# Altium PCB CurrentTrans-board-multi.PcbDoc
Units mm, origin at the board's own origin, x right, y up, seen from the top; angles counter-clockwise.
Board outline 89.79 x 173.35 mm, 2 copper layers (Top Layer, Bottom Layer); 11 components, 11 nets, 57 pads, 0 vias.
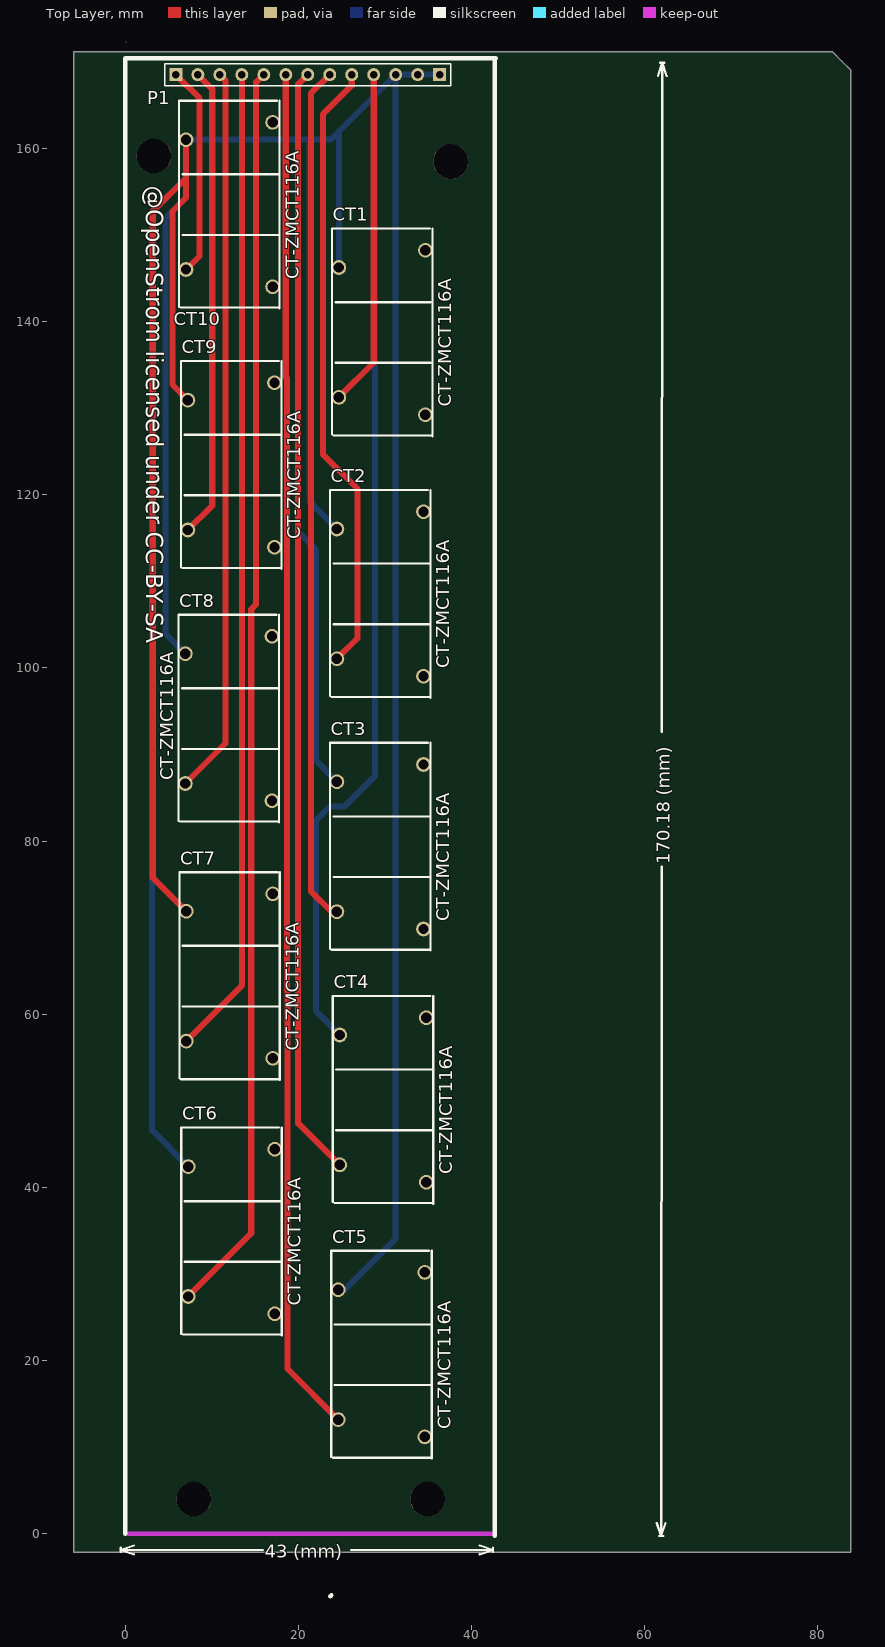
[diagram p0: Top Layer view]
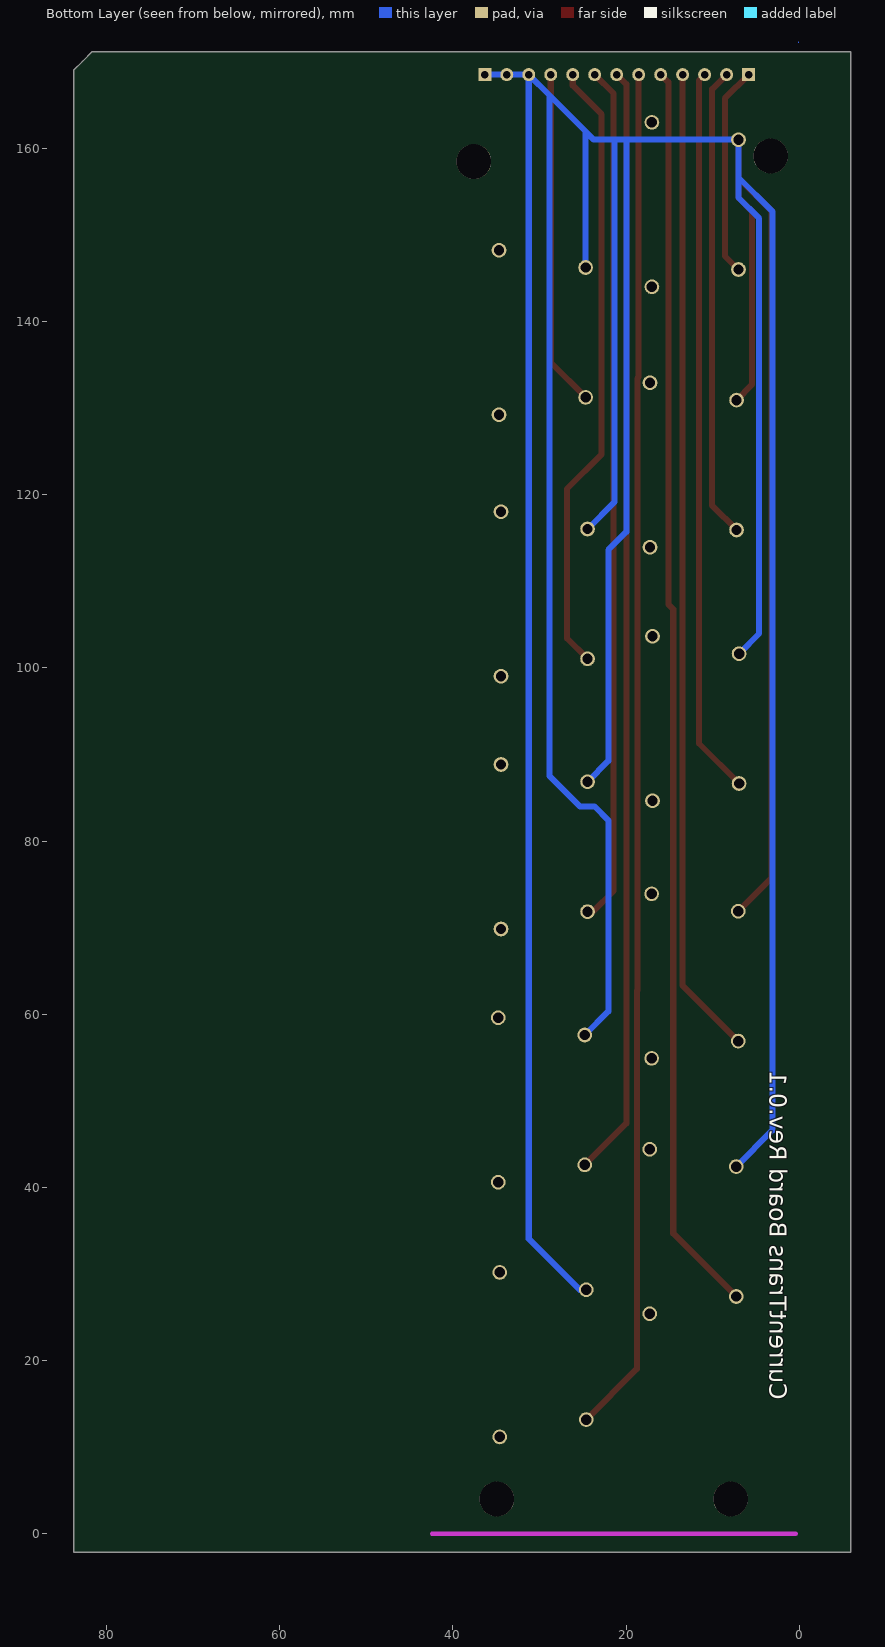
[diagram p1: Bottom Layer view, seen from below]

## Layer stack, top to bottom
Top Layer: signal copper 0.0356
Dielectric: dielectric 0.32, FR-4, Dk 4.8
Bottom Layer: signal copper 0.0356

## Board outline
-5.969,-2.159 83.82,-2.159 83.82,169.037 82.804,170.053 81.661,171.196 -5.969,171.196

## Design rules (kind name [scope] priority, off if disabled: settings)
Clearance [All] p1: gap=0.254
PolygonConnect [All] p1: connectstyle=Relief reliefconductorwidth=0.254 reliefentries=4 polygonreliefangle="90 Angle" airgapwidth=0.254
RoutingVias [All] p1: holewidth=0.711 width=1.27 viastyle="Through Hole" minholewidth=0.711 minwidth=1.27 maxholewidth=0.711 maxwidth=1.27
SilkToSilkClearance [All] p1 off: silktosilkclearance=0.254
SilkToSolderMaskClearance [IsPad] p1 off: minsilkscreentomaskgap=0.254 clearancetoexposedcopper=TRUE
SolderMaskExpansion [All] p1: expansion=0.102
Width [All] p1: maxlimit=2 minlimit=0.254 preferedwidth=0.7
26 further rules are at their usual default settings.

## Components (designator, comment, footprint, x,y, rotation, side; value= is the part's Value field where it differs from the comment)
CT1 "CurrentTransf" CT-ZMCT124 24.675,131.25 r90 top
CT2 "CurrentTransf" CT-ZMCT124 24.45,101.05 r90 top
CT3 "CurrentTransf" CT-ZMCT124 24.45,71.85 r90 top
CT4 "CurrentTransf" CT-ZMCT124 24.775,42.6 r90 top
CT5 "CurrentTransf" CT-ZMCT124 24.6,13.175 r90 top
CT6 "CurrentTransf" CT-ZMCT124 7.275,27.4 r90 top
CT7 "CurrentTransf" CT-ZMCT124 7.05,56.9 r90 top
CT8 "CurrentTransf" CT-ZMCT124 6.95,86.65 r90 top
CT9 "CurrentTransf" CT-ZMCT124 7.239,115.937 r90 top
CT10 "CurrentTransf" CT-ZMCT124 7.018,146.018 r90 top
P1 "Header 13" HDR1X13 36.322,168.529 r180 top

## Footprints (in the part's own frame and the unit in brackets; to place one, negate y for a bottom-side part, rotate by r counter-clockwise, add the part's x,y. Pads: shape width x height; smd on the part's side, far side on the other; paste and mask are expansions set on the pad)
CT-ZMCT124 [mm] "current transformer"
  round 1.7 hole 1.2: 1(0,0) 2(15,0) 3(-2,-10) 4(17,-10)
  silkscreen extent -4.5,-10.8 19.5,0.8, body extent -4.63,-10.93 19.63,0.93, height 21
HDR1X13 [mm] "Connector; Header; 13 Position"
  rect 1.5x1.5 hole 0.9: 1(0,0) 13(30.48,0)
  round 1.5 hole 0.9: 2(2.54,0) 3(5.08,0) 4(7.62,0) 5(10.16,0) 6(12.7,0) 7(15.24,0) 8(17.78,0) 9(20.32,0) 10(22.86,0) 11(25.4,0) 12(27.94,0)
  silkscreen extent -1.27,-1.27 31.75,1.27

## Part data
P1: "Header, 13-Pin"

## Free pads (board coordinates)
  round 4 hole 4: 0(3.302,159.131) 0(7.925,4) 0(34.925,4) 0(37.592,158.496)

## Nets (pads, with @x,y where several pads share a name; then routed paths per layer and width w, separated by ;. In a path a pad name is that pad's centre, name@x,y a point inside that pad or via, vN(x,y) a via of type N, cw(c..) or ccw(c..) an arc to the next point about the centre after c; other vN are vias at no path point)
NetCT1_1: CT1.1 P1.4 | length 38.9
  Top Layer w0.7: CT1.1 28.702,135.277 P1.4
NetCT1_2: CT1.2 CT2.2 CT3.2 CT4.2 CT5.2 CT6.2 CT7.2 CT8.2 CT9.2 CT10.2 P1.1 P1.2 P1.3 | length 725.7
  Top Layer w0.7: CT10.2 7.018,156.575 ; CT7.2 3.175,75.775 3.175,152.732 7.018,156.575 ; CT9.2 5.461,132.715 5.461,152.73 7.018,154.287 7.018,156.575
  Bottom Layer w0.7: CT8.2 4.625,103.975 4.625,151.925 7.018,154.318 7.018,156.65 ; CT6.2 3.1,46.575 3.1,152.732 7.018,156.65 ; CT3.2 22.042,89.258 22.042,113.642 19.975,115.709 19.975,161.018 ; CT2.2 21.313,119.187 21.313,160.955 21.25,161.018 ; CT5.2 25.35,28.175 31.242,34.067 P1.3 ; CT1.2 24.675,161.962 ; CT4.2 22.042,60.333 22.042,82.4 23.65,84.008 25.333,84.008 28.832,87.507 28.832,166.119 ; P1.1 P1.2 P1.3 ; 7.018,156.65 CT10.2 19.975,161.018 ; 19.975,161.018 21.25,161.018 ; 21.25,161.018 23.731,161.018 24.675,161.962 ; 24.675,161.962 28.832,166.119 ; 28.832,166.119 P1.3
NetCT2_1: CT2.1 P1.5 | length 71.5
  Top Layer w0.7: CT2.1 26.825,103.425 26.825,120.675 22.825,124.675 22.825,163.95 26.162,167.287 P1.5
NetCT3_1: CT3.1 P1.6 | length 99.2
  Top Layer w0.7: P1.6 21.45,166.357 21.45,74.225 23.825,71.85 CT3.1
NetCT4_1: CT4.1 P1.7 | length 128.4
  Top Layer w0.7: P1.7 19.975,167.422 19.975,47.4 CT4.1
NetCT5_1: CT5.1 P1.8 | length 157.9
  Top Layer w0.7: P1.8 18.542,133.604 18.694,133.452 18.694,62.763 18.745,62.713 18.745,19.03 CT5.1
NetCT6_1: CT6.1 P1.9 | length 144.7
  Top Layer w0.7: CT6.1 14.554,34.679 14.554,106.782 15.125,107.352 15.125,167.652 P1.9
NetCT7_1: CT7.1 P1.10 | length 114.3
  Top Layer w0.7: CT7.1 13.462,63.312 P1.10
NetCT8_1: CT8.1 P1.11 | length 84.1
  Top Layer w0.7: CT8.1 11.575,91.275 11.575,167.876 P1.11
NetCT9_1: CT9.1 P1.12 | length 54.4
  Top Layer w0.7: CT9.1 10.05,118.748 10.05,166.861 P1.12
NetCT10_1: CT10.1 P1.13 | length 24.3
  Top Layer w0.7: P1.13 8.585,165.786 8.585,147.585 CT10.1
pads on no net: CT1.3 CT1.4 CT2.3 CT2.4 CT3.3 CT3.4 CT4.3 CT4.4 CT5.3 CT5.4 CT6.3 CT6.4 CT7.3 CT7.4 CT8.3 CT8.4 CT9.3 CT9.4 CT10.3 CT10.4

## Keep-outs
Keep-Out Layer:
  lines w0.508: 0.381,0 42.418,0

## Other copper
Bottom Layer:
  rectangle: 0,172.212 0.127,172.339

## Silkscreen, mask and mechanical layers (free items; w line width, h text height)
Top Overlay:
  lines w0.254: -0.521,-2.134 -0.521,-1.626 ; 1.003,-2.388 -0.521,-1.88 ; 1.003,-1.372 -0.521,-1.88 ; 15.875,-1.88 -0.521,-1.88 ; 26.083,-1.88 42.479,-1.88 ; 40.955,-2.388 42.479,-1.88 ; 40.955,-1.372 42.479,-1.88 ; 42.479,-2.134 42.479,-1.626 ; 61.4,1.247 61.907,-0.277 ; 61.525,168.379 62.034,169.903 ; 61.653,-0.277 62.161,-0.277 ; 61.78,169.903 62.288,169.903 ; 61.964,77.043 61.907,-0.277 ; 61.976,92.583 62.034,169.903 ; 62.416,1.247 61.907,-0.277 ; 62.541,168.379 62.034,169.903
  lines w0.508: 0,0 0,170.434 42.799,170.434 ; 23.675,-7.25 23.825,-7.1 ; 42.672,-0.254 42.672,170.18
  text "@OpenStrom licensed under CC-BY-SA" at 2.413,155.702 h2 r270
  text "170.18 (mm)" at 62.879,77.296 h1.52 r89.96
  text "43 (mm)" at 16.129,-2.794 h1.52
Bottom Overlay:
  text "CurrentTrans Board Rev.0.1" at 3.429,15.494 h2 r90

## Text inside footprints (layer, text, board x,y; h text height)
CT1: Top Overlay "CT-ZMCT116A" at 37.675,130.15 h1.52 r90
CT2: Top Overlay "CT-ZMCT116A" at 37.45,99.95 h1.52 r90
CT3: Top Overlay "CT-ZMCT116A" at 37.45,70.75 h1.52 r90
CT4: Top Overlay "CT-ZMCT116A" at 37.775,41.5 h1.52 r90
CT5: Top Overlay "CT-ZMCT116A" at 37.6,12.075 h1.52 r90
CT6: Top Overlay "CT-ZMCT116A" at 20.275,26.3 h1.52 r90
CT7: Top Overlay "CT-ZMCT116A" at 20.05,55.8 h1.52 r90
CT8: Top Overlay "CT-ZMCT116A" at 5.553,87.045 h1.52 r90
CT9: Top Overlay "CT-ZMCT116A" at 20.239,114.837 h1.52 r90
CT10: Top Overlay "CT-ZMCT116A" at 20.018,144.918 h1.52 r90